# Altium PCB zs-pentagon-dip.PcbDoc
Units mm, origin at the board's own origin, x right, y up, seen from the top; angles counter-clockwise.
Board outline 210 x 160 mm, 2 copper layers (Top Layer, Bottom Layer); 130 components, 242 nets, 1119 pads, 0 vias.
Unrouted connection lines stored in the file: 807.
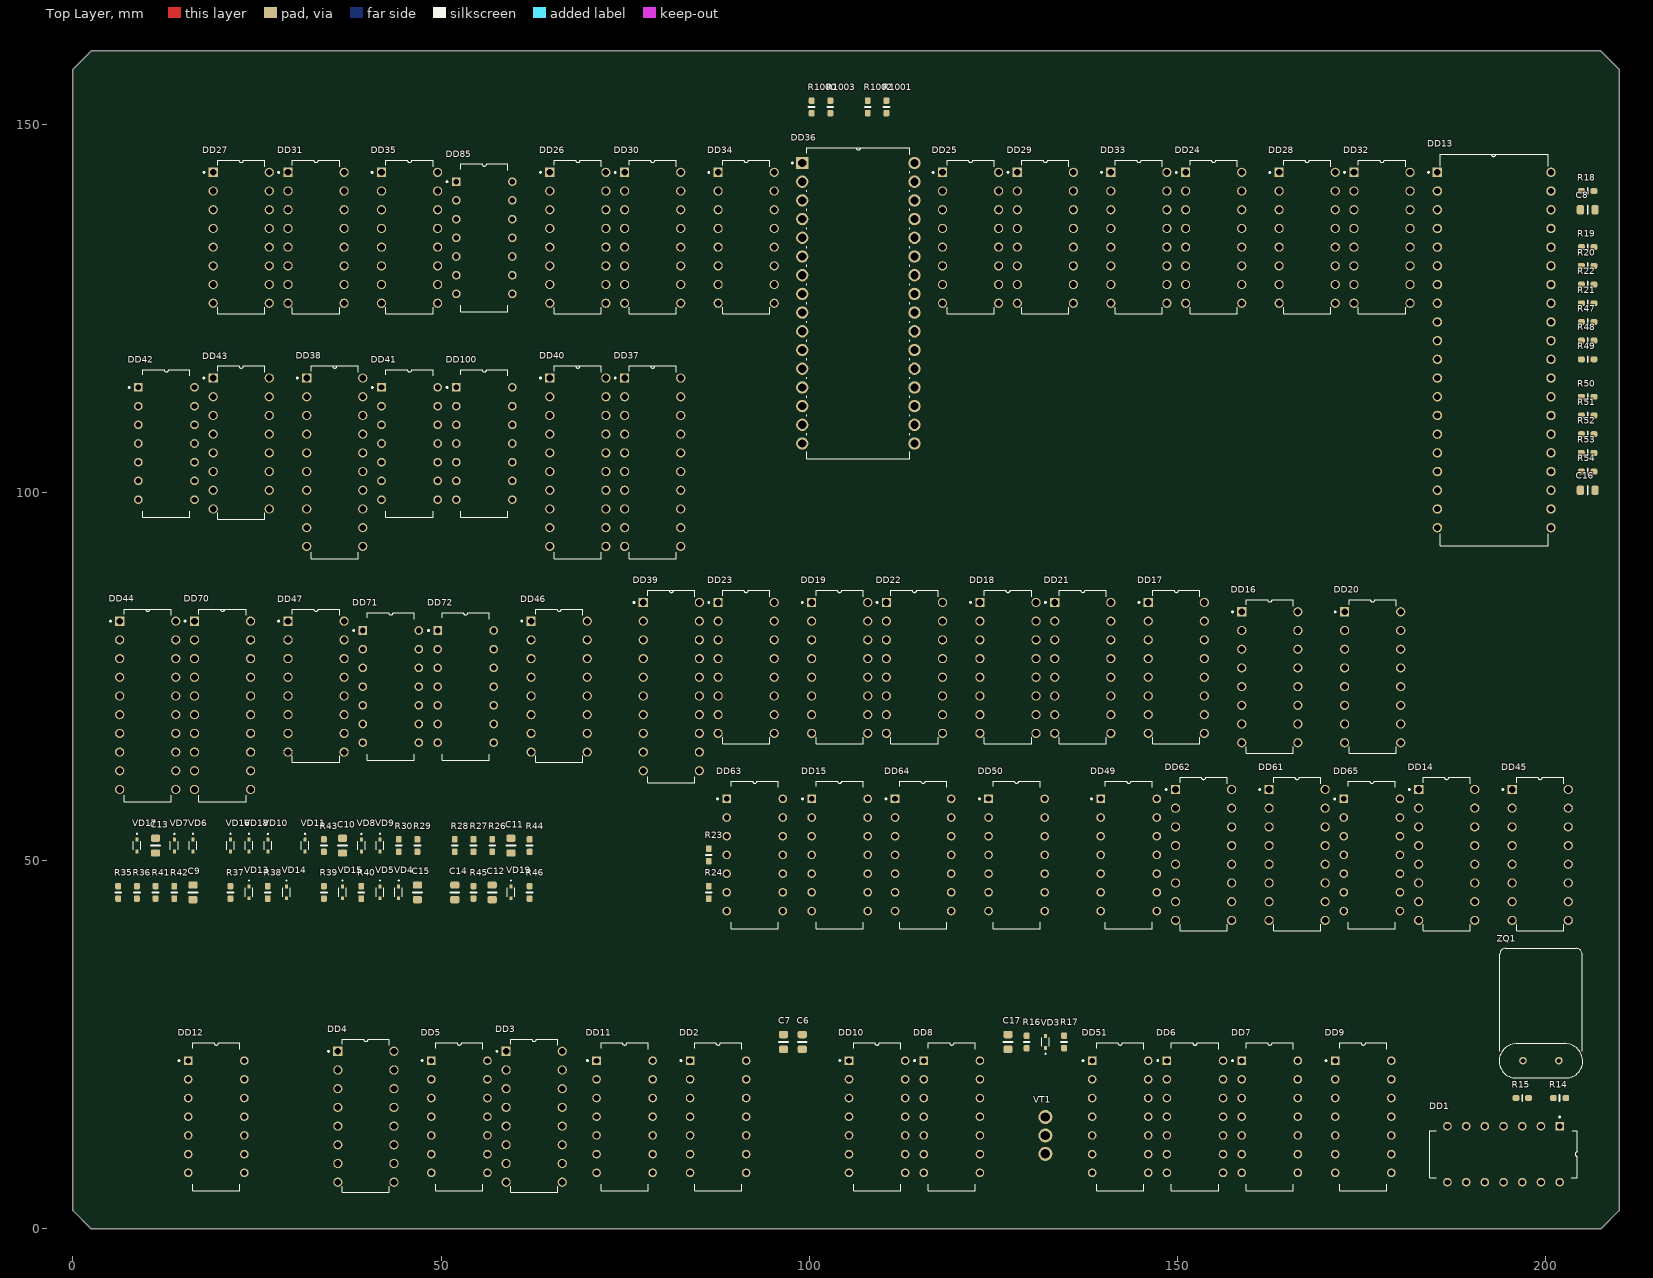
[diagram p0: Top Layer view]
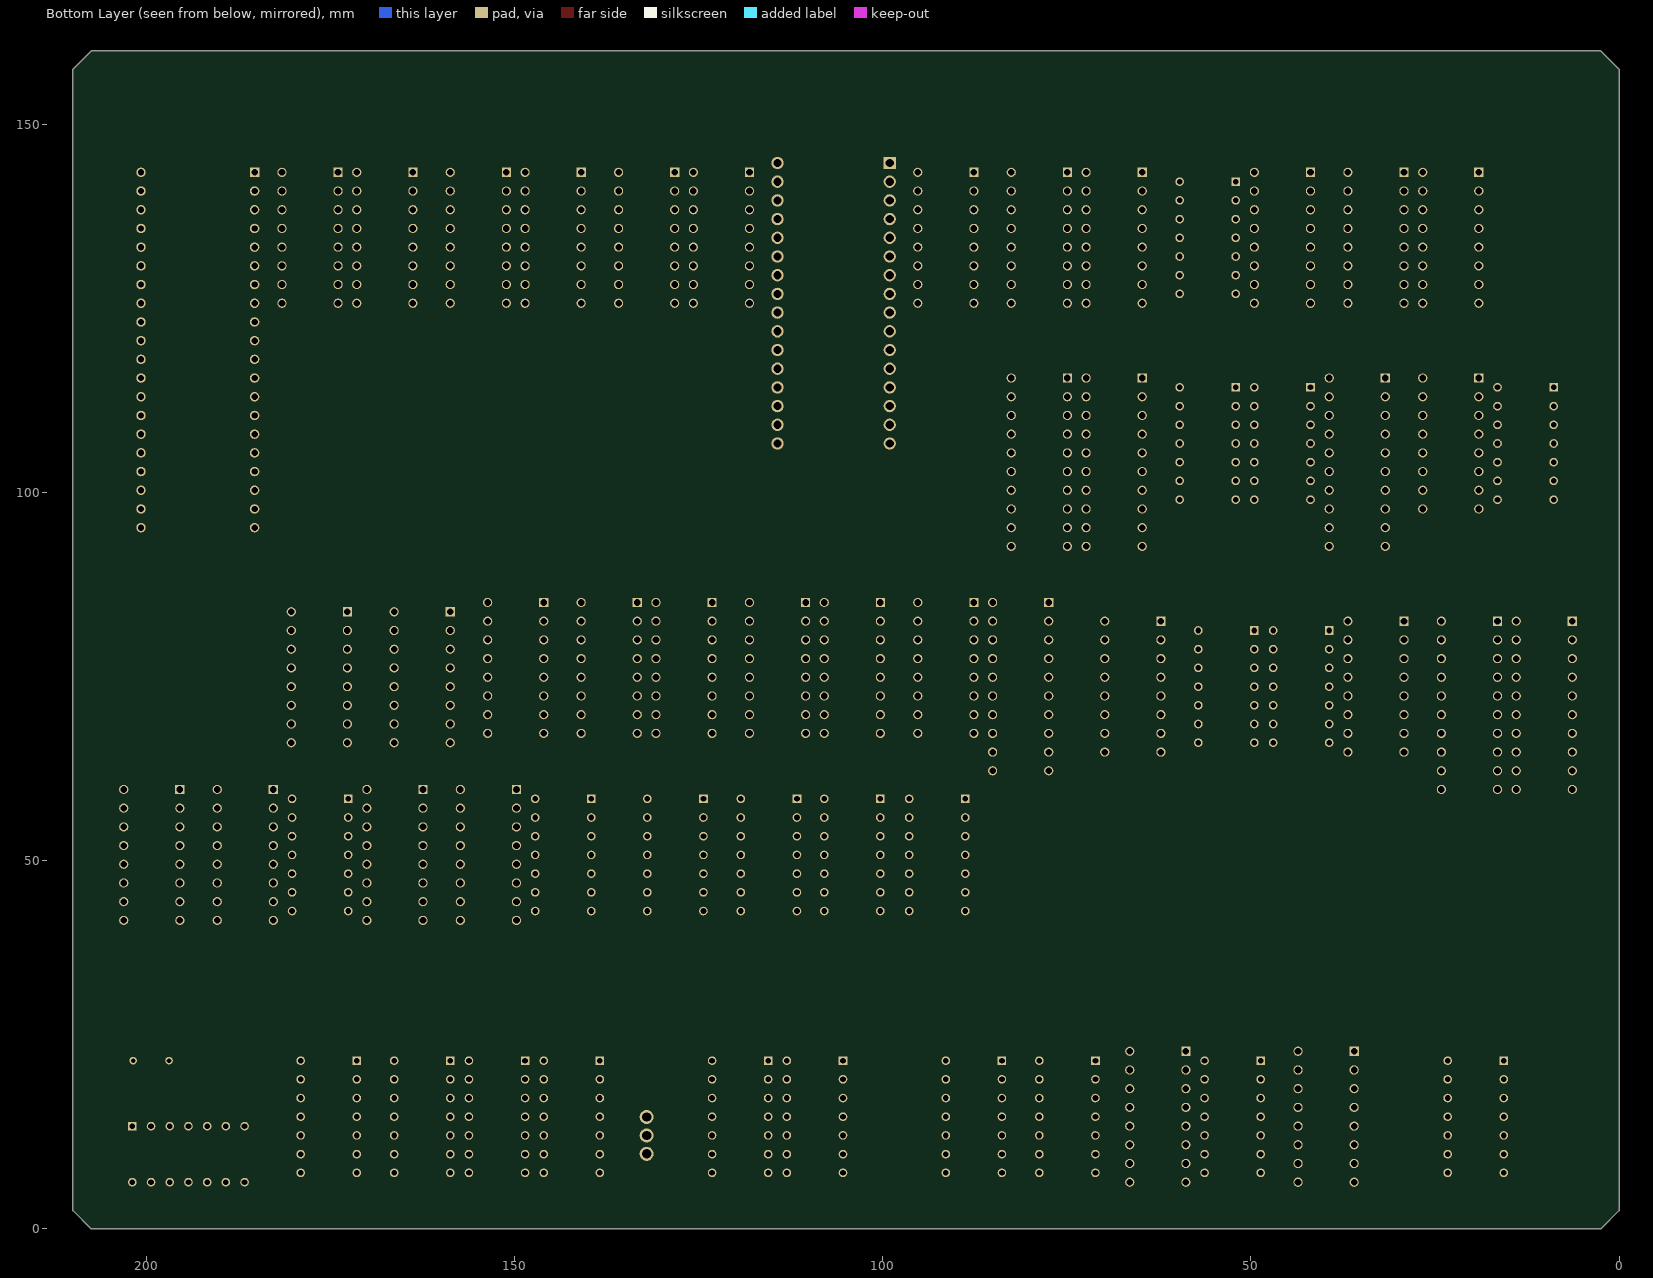
[diagram p1: Bottom Layer view, seen from below]

## Layer stack, top to bottom
Top Solder: solder mask 0.0102, Solder Resist, Dk 3.5
Top Layer: signal copper 0.0356
Dielectric 1: dielectric 0.32, FR-4, Dk 4.8
Bottom Layer: signal copper 0.0356
Bottom Solder: solder mask 0.0102, Solder Resist, Dk 3.5

## Board outline
2.5,0 0,2.5 0,157.5 2.5,160 207.5,160 210,157.5 210,2.5 207.5,0

## Design rules (kind name [scope] priority, off if disabled: settings)
Clearance [All] p1: gap=0.254 ignorepadtopadclearanceinfootprint=FALSE except(0: Arc-Hole Track-Hole SMDPad-Hole THPad-Hole Via-Hole Fill-Hole Poly-Hole Region-Hole Text-Hole)
PolygonConnect [All] p1: connectstyle=Relief reliefconductorwidth=0.254 reliefentries=4 polygonreliefangle="90 Angle" airgapwidth=0.254
RoutingVias [All] p1: holewidth=0.711 width=1.27 viastyle="Through Hole" minholewidth=0.711 minwidth=1.27 maxholewidth=0.711 maxwidth=1.27
SolderMaskExpansion [All] p1: expansion=0.102
Width [All] p1: maxlimit=0.254 minlimit=0.254 preferedwidth=0.254
30 further rules are at their usual default settings.

## Classes and differential pairs
component class zs-pentagon-dip_3: C9 C10 C11 C12 C13 C14 C15 DD10 DD37 DD38 DD40 DD41 DD42 DD43 DD44 DD46 DD47 DD49 DD70 DD71 DD72 DD100 R26 R27 R28 R29 R30 R35 R36 R37 R38 R39 R40 R41 R42 R43 R44 R45 R46 VD4 VD5 VD6 VD7 VD8 VD9 VD10 VD11 VD13 VD14 VD15 VD16 VD17 VD18 VD19
component class zs-pentagon-dip_2: C8 C16 DD13 DD16 DD17 DD18 DD19 DD20 DD21 DD22 DD23 DD24 DD25 DD26 DD27 DD28 DD29 DD30 DD31 DD32 DD33 DD34 DD35 DD36 DD39 DD85 R18 R19 R20 R21 R22 R47 R48 R49 R50 R51 R52 R53 R54 R1000 R1001 R1002 R1003
component class zs-pentagon-dip_1: C6 C7 C17 DD1 DD2 DD3 DD4 DD5 DD6 DD7 DD8 DD9 DD11 DD12 DD14 DD15 DD45 DD50 DD51 DD61 DD62 DD63 DD64 DD65 R14 R15 R16 R17 R23 R24 VD3 VT1 ZQ1

## Components (designator, comment, footprint, x,y, rotation, side; value= is the part's Value field where it differs from the comment)
C6 "0.022 мкФ" C0805 99.06,25.4 r90 top
C7 "510 пФ" C0805 96.52,25.4 r90 top
C8 "10 мкФ" C0805 205.74,138.43 r180 top
C9 "0.47 мкФ" C0805 16.307,45.72 r270 top
C10 "0.22 мкФ" C0805 36.627,52.07 r270 top
C11 "0.1 мкФ" C0805 59.487,52.07 r270 top
C12 "1 мкФ" C0805 56.947,45.72 r270 top
C13 "10 мкФ" C0805 11.227,52.07 r270 top
C14 "1 мкФ" C0805 51.867,45.72 r270 top
C15 "1 мкФ" C0805 46.787,45.72 r270 top
C16 "51 пФ" C0805 205.74,100.33 r180 top
C17 "1200 пФ" C0805 127,25.4 r90 top
DD1 "КР1533ЛН1" DIP14 194.31,10.16 r270 top
DD2 "КР1533ИЕ5" DIP14 87.63,15.24 r0 top
DD3 "КР1533ИЕ7" DIP16 62.65,15.24 r0 top
DD4 "КР1533ИЕ7" DIP16 39.79,15.24 r0 top
DD5 "КР1533ЛИ3" DIP14 52.49,15.24 r0 top
DD6 "КР1533ЛП5" DIP14 152.4,15.24 r0 top
DD7 "КР1533ЛA3" DIP14 162.56,15.24 r0 top
DD8 "КР1533ЛЕ1" DIP14 119.38,15.24 r0 top
DD9 "КР1533ЛИ1" DIP14 175.26,15.24 r0 top
DD10 "КР1533ТМ2" DIP14 109.22,15.24 r0 top
DD11 "КР1533ИЕ5" DIP14 74.93,15.24 r0 top
DD12 "КР1533ИЕ5" DIP14 19.47,15.24 r0 top
DD13 "Z80" DIP1540W47P254L5320H635Q40B 193.04,119.38 r0 top
DD14 "КР1533КП11А" DIP16 186.59,50.8 r0 top
DD15 "КР1533ТМ2" DIP14 104.14,50.8 r0 top
DD16 "КР1533КП11А" DIP16 162.56,74.93 r0 top
DD17 "КР1533КП11А" DIP16 149.86,76.2 r0 top
DD18 "КР1533КП11А" DIP16 127,76.2 r0 top
DD19 "КР1533КП11А" DIP16 104.14,76.2 r0 top
DD20 "КР565РУ7Г" DIP16 176.53,74.93 r0 top
DD21 "КР565РУ7Г" DIP16 137.16,76.2 r0 top
DD22 "КР565РУ7Г" DIP16 114.3,76.2 r0 top
DD23 "КР565РУ7Г" DIP16 91.44,76.2 r0 top
DD24 "КР565РУ7Г" DIP16 154.94,134.62 r0 top
DD25 "КР565РУ7Г" DIP16 121.92,134.62 r0 top
DD26 "КР565РУ7Г" DIP16 68.58,134.62 r0 top
DD27 "КР565РУ7Г" DIP16 22.86,134.62 r0 top
DD28 "КР565РУ7Г" DIP16 167.64,134.62 r0 top
DD29 "КР565РУ7Г" DIP16 132.08,134.62 r0 top
DD30 "КР565РУ7Г" DIP16 78.74,134.62 r0 top
DD31 "КР565РУ7Г" DIP16 33.02,134.62 r0 top
DD32 "КР565РУ7Г" DIP16 177.8,134.62 r0 top
DD33 "КР565РУ7Г" DIP16 144.78,134.62 r0 top
DD34 "КР565РУ7Г" DIP16 91.44,134.62 r0 top
DD35 "КР565РУ7Г" DIP16 45.72,134.62 r0 top
DD36 "AM29F040B" DIP254P1524X482-32 114.3,106.68 r0 top
DD37 "КР1533ИР23" DIP20 78.74,104.14 r0 top
DD38 "КР1533ИР23" DIP20 35.56,104.14 r0 top
DD39 "КР1533ИР23" DIP20 81.28,73.66 r0 top
DD40 "КР1533ИР23" DIP20 68.58,104.14 r0 top
DD41 "К555ИР16" DIP14 45.72,106.68 r0 top
DD42 "К555ИР16" DIP14 12.7,106.68 r0 top
DD43 "КР1533ТМ8" DIP16 22.86,106.68 r0 top
DD44 "КР1533АП5" DIP20 10.16,71.12 r0 top
DD45 "КР1533ТМ8" DIP16 199.29,50.8 r0 top
DD46 "КР1533КП2" DIP16 66.04,73.66 r0 top
DD47 "КР1533КП2" DIP16 33.02,73.66 r0 top
DD49 "КР1533ЛA3" DIP14 143.41,50.8 r0 top
DD50 "КР1533ЛЕ1" DIP14 128.17,50.8 r0 top
DD51 "КР1533ЛН1" DIP14 142.24,15.24 r0 top
DD61 "КР1533КП11А" DIP16 166.27,50.8 r0 top
DD62 "КР1533ТМ9" DIP16 153.57,50.8 r0 top
DD63 "КР1533ЛA3" DIP14 92.61,50.8 r0 top
DD64 "КР1533ЛЕ1" DIP14 115.47,50.8 r0 top
DD65 "КР1533ЛЛ1" DIP14 176.43,50.8 r0 top
DD70 "КР1533АП5" DIP20 20.32,71.12 r0 top
DD71 "КР1533ЛП5" DIP14 43.18,73.66 r0 top
DD72 "К155ЛA12" DIP14 53.34,73.66 r0 top
DD85 "КР1533ЛЛ1" DIP14 55.88,134.62 r0 top
DD100 "К561ЛН2" DIP14 55.88,106.68 r0 top
R14 "510 Ом" R0603 201.93,17.78 r180 top
R15 "510 Ом" R0603 196.85,17.78 r180 top
R16 "160 Ом" R0603 129.54,25.4 r90 top
R17 "1 кОм" R0603 134.62,25.4 r270 top
R18 "10 кОм" R0603 205.74,140.97 r180 top
R19 "10 кОм" R0603 205.74,133.35 r180 top
R20 "10 кОм" R0603 205.74,130.81 r180 top
R21 "750 Ом" R0603 205.74,125.73 r180 top
R22 "10 кОм" R0603 205.74,128.27 r180 top
R23 "470 Ом" R0603 86.36,50.8 r90 top
R24 "470 Ом" R0603 86.36,45.72 r90 top
R26 "10 кОм" R0603 56.947,52.07 r270 top
R27 "10 кОм" R0603 54.407,52.07 r270 top
R28 "10 кОм" R0603 51.867,52.07 r270 top
R29 "10 кОм" R0603 46.787,52.07 r270 top
R30 "10 кОм" R0603 44.247,52.07 r270 top
R35 "68 Ом" R0603 6.147,45.72 r270 top
R36 "68 Ом" R0603 8.687,45.72 r270 top
R37 "68 Ом" R0603 21.387,45.72 r270 top
R38 "68 Ом" R0603 26.467,45.72 r270 top
R39 "68 Ом" R0603 34.087,45.72 r270 top
R40 "68 Ом" R0603 39.167,45.72 r270 top
R41 "1 МОм" R0603 11.227,45.72 r270 top
R42 "1 МОм" R0603 13.767,45.72 r270 top
R43 "10 кОм" R0603 34.087,52.07 r270 top
R44 "430 Ом" R0603 62.027,52.07 r270 top
R45 "620 Ом" R0603 54.407,45.72 r270 top
R46 "100 кОм" R0603 62.027,45.72 r270 top
R47 "10 кОм" R0603 205.74,123.19 r180 top
R48 "10 кОм" R0603 205.74,120.65 r180 top
R49 "10 кОм" R0603 205.74,118.11 r180 top
R50 "10 кОм" R0603 205.74,113.03 r180 top
R51 "10 кОм" R0603 205.74,110.49 r180 top
R52 "10 кОм" R0603 205.74,107.95 r180 top
R53 "10 кОм" R0603 205.74,105.41 r180 top
R54 "10 кОм" R0603 205.74,102.87 r180 top
R1000 "0 Ом" R0603 100.33,152.4 r90 top
R1001 "0 Ом" R0603 110.49,152.4 r90 top
R1002 "0 Ом" R0603 107.95,152.4 r90 top
R1003 "0 Ом" R0603 102.87,152.4 r90 top
VD3 "1N4148W" SODFL1608X70N 132.08,25.4 r90 top
VD4 "1N4148W" SODFL1608X70N 44.247,45.72 r270 top
VD5 "1N4148W" SODFL1608X70N 41.707,45.72 r270 top
VD6 "1N4148W" SODFL1608X70N 16.307,52.07 r270 top
VD7 "1N4148W" SODFL1608X70N 13.767,52.07 r270 top
VD8 "1N4148W" SODFL1608X70N 39.167,52.07 r270 top
VD9 "1N4148W" SODFL1608X70N 41.707,52.07 r270 top
VD10 "1N4148W" SODFL1608X70N 26.467,52.07 r270 top
VD11 "1N4148W" SODFL1608X70N 31.547,52.07 r270 top
VD13 "1N4148W" SODFL1608X70N 23.927,45.72 r270 top
VD14 "1N4148W" SODFL1608X70N 29.007,45.72 r270 top
VD15 "1N4148W" SODFL1608X70N 36.627,45.72 r270 top
VD16 "1N4148W" SODFL1608X70N 21.387,52.07 r270 top
VD17 "1N4148W" SODFL1608X70N 8.687,52.07 r270 top
VD18 "1N4148W" SODFL1608X70N 23.927,52.07 r270 top
VD19 "1N4148W" SODFL1608X70N 59.487,45.72 r270 top
VT1 "КТ315Б" KT-13 132.08,12.7 r90 top
ZQ1 "14 MHz" XTAL_HC-49U 199.39,22.86 r0 top

## Footprints (in the part's own frame and the unit in brackets; to place one, negate y for a bottom-side part, rotate by r counter-clockwise, add the part's x,y. Pads: shape width x height; smd on the part's side, far side on the other; paste and mask are expansions set on the pad)
C0805 [mm] "Chip_Capasitor_0805"
  rrect50% 1x1.25 smd mask+0.102: 1(-1,0) 2(1,0)
  silkscreen extent 0,-0.6 0,0.6, body extent -1,-0.64 1,0.65, height 1.35
DIP14 [mm]
  rect 1.17x1.17 hole 0.77: 1(-3.81,7.62)
  round 1.17 hole 0.77: 2(-3.81,5.08) 3(-3.81,2.54) 4(-3.81,0) 5(-3.81,-2.54) 6(-3.81,-5.08) 7(-3.81,-7.62) 8(3.81,-7.62) 9(3.81,-5.08) 10(3.81,-2.54) 11(3.81,0) 12(3.81,2.54) 13(3.81,5.08) 14(3.81,7.62)
  silkscreen extent -5.15,-10.03 3.2,10.03, body extent -3.96,-9.65 3.96,9.65, height 5.59
DIP16 [mm]
  rect 1.25x1.25 / inner round 1.25 / far side rect 1.25x1.25 hole 0.9: 1(-3.81,8.89)
  round 1.25 hole 0.9: 2(-3.81,6.35) 3(-3.81,3.81) 4(-3.81,1.27) 5(-3.81,-1.27) 6(-3.81,-3.81) 7(-3.81,-6.35) 8(-3.81,-8.89) 9(3.81,-8.89) 10(3.81,-6.35) 11(3.81,-3.81) 12(3.81,-1.27) 13(3.81,1.27) 14(3.81,3.81) 15(3.81,6.35) 16(3.81,8.89)
  silkscreen extent -5.18,-10.29 3.2,10.54, body extent -4.62,-10 4.62,10, height 5.1
DIP20 [mm]
  rect 1.25x1.25 / inner round 1.25 / far side rect 1.25x1.25 hole 0.9: 1(-3.81,11.43)
  round 1.25 hole 0.9: 2(-3.81,8.89) 3(-3.81,6.35) 4(-3.81,3.81) 5(-3.81,1.27) 6(-3.81,-1.27) 7(-3.81,-3.81) 8(-3.81,-6.35) 9(-3.81,-8.89) 10(-3.81,-11.43) 11(3.81,-11.43) 12(3.81,-8.89) 13(3.81,-6.35) 14(3.81,-3.81) 15(3.81,-1.27) 16(3.81,1.27) 17(3.81,3.81) 18(3.81,6.35) 19(3.81,8.89) 20(3.81,11.43)
  silkscreen extent -5.18,-13.08 3.2,13.08, body extent -3.94,-12.7 3.94,12.7, height 5.08
DIP254P1524X482-32 [mil]
  rect 66x66 hole 44: 1(-600,1500)
  round 66 hole 44: 2(-600,1400) 3(-600,1300) 4(-600,1200) 5(-600,1100) 6(-600,1000) 7(-600,900) 8(-600,800) 9(-600,700) 10(-600,600) 11(-600,500) 12(-600,400) 13(-600,300) 14(-600,200) 15(-600,100) 16(-600,0) 17(0,0) 18(0,100) 19(0,200) 20(0,300) 21(0,400) 22(0,500) 23(0,600) 24(0,700) 25(0,800) 26(0,900) 27(0,1000) 28(0,1100) 29(0,1200) 30(0,1300) 31(0,1400) 32(0,1500)
  silkscreen extent -657,-82 -25,1582, body extent -645,-49 49,1549, height 377
DIP1540W47P254L5320H635Q40B [mm]
  rect 1.28x1.28 hole 0.85: 1(-7.718,24.13)
  round 1.28 hole 0.85: 2(-7.718,21.59) 3(-7.718,19.05) 4(-7.718,16.51) 5(-7.718,13.97) 6(-7.718,11.43) 7(-7.718,8.89) 8(-7.718,6.35) 9(-7.718,3.81) 10(-7.718,1.27) 11(-7.718,-1.27) 12(-7.718,-3.81) 13(-7.718,-6.35) 14(-7.718,-8.89) 15(-7.718,-11.43) 16(-7.718,-13.97) 17(-7.718,-16.51) 18(-7.718,-19.05) 19(-7.718,-21.59) 20(-7.718,-24.13) 21(7.718,-24.13) 22(7.718,-21.59) 23(7.718,-19.05) 24(7.718,-16.51) 25(7.718,-13.97) 26(7.718,-11.43) 27(7.718,-8.89) 28(7.718,-6.35) 29(7.718,-3.81) 30(7.718,-1.27) 31(7.718,1.27) 32(7.718,3.81) 33(7.718,6.35) 34(7.718,8.89) 35(7.718,11.43) 36(7.718,13.97) 37(7.718,16.51) 38(7.718,19.05) 39(7.718,21.59) 40(7.718,24.13)
  silkscreen extent -9.02,-26.6 7.35,26.6, body extent -8.85,-26.2 8.85,26.2, height 9.06
KT-13 [mm]
  round 1.905 hole 1.27: 1(-2.5,0) 2(0,0) 3(2.5,0)
  body extent -3.6,-1.35 3.6,1.65, height 5.72
R0603 [mm] "Chip_Resistor_0603"
  rrect50% 0.9x0.8 smd mask+0.1: 1(-0.85,0) 2(0.85,0)
  silkscreen extent 0,-0.4 0,0.4, body extent -0.8,-0.4 0.8,0.4, height 0.45
SODFL1608X70N [mm]
  rrect10% 0.53x0.4 smd: A(0.8,0) C(-0.8,0)
  silkscreen extent -1.65,-0.52 0.6,0.52, body extent -0.8,-0.4 0.8,0.4, height 0.7
XTAL_HC-49U [mm]
  round 1.03 hole 0.63: 1(-2.44,0) 2(2.44,0)
  silkscreen extent -5.68,-2.33 5.68,15.24, body extent -5.51,-2.5 5.84,2.5, height 14.22

## Part data
C6 C7 C8 C9 C10 C11 C12 C13 C14 C15 C16 C17: library part CapCer
R14 R15 R16 R17 R18 R19 R20 R21 R22 R23 R24 R26 R27 R28 R29 R30 R35 R36 R37 R38 R39 R40 R41 R42 R43 R44 R45 R46 R47 R48 R49 R50 R51 R52 R53 R54 R1000 R1001 R1002 R1003: library part Res
VT1: "NPN Transistor"
ZQ1: library part HC-49U_14M

## Nets (pads, with @x,y where several pads share a name; then routed paths per layer and width w, separated by ;. In a path a pad name is that pad's centre, name@x,y a point inside that pad or via, vN(x,y) a via of type N, cw(c..) or ccw(c..) an arc to the next point about the centre after c; other vN are vias at no path point)
A0: DD13.30 DD18.3 DD36.12 DD50.8
A1: DD13.31 DD18.6 DD36.11 DD64.5
A2: DD13.32 DD18.10 DD36.10
A3: DD13.33 DD18.13 DD36.9
A4: DD13.34 DD19.3 DD36.8
A5: DD13.35 DD19.6 DD36.7
A6: DD13.36 DD19.10 DD36.6
A7: DD13.37 DD18.2 DD36.5
A8: DD13.38 DD18.5 DD36.27 DD70.2
A9: DD13.39 DD18.11 DD36.26 DD70.4
A10: DD13.40 DD18.14 DD36.23 DD70.6
A11: DD13.1 DD19.2 DD36.25 DD70.8
A12: DD13.2 DD19.5 DD36.4 DD70.11
A13: DD13.3 DD19.11 DD36.28 DD70.13
A14: DD13.4 DD36.29 DD50.2 DD61.3 DD61.10 DD63.4 DD70.15
A15: DD13.5 DD36.3 DD50.3 DD61.6 DD63.5 DD64.6 DD70.17
B1: DD3.6 DD10.11 DD16.3
B2: DD3.7 DD16.6
B3: DD1.5 DD4.3 DD16.10
B4: DD4.2 DD8.8 DD16.13
B5: DD4.6 DD9.12 DD17.3
B6: DD2.12 DD11.14 DD14.3
B7: DD11.1 DD11.12 DD14.6
B8: DD11.9 DD14.10
B9: DD11.8 DD17.6
B10: DD5.9 DD11.11 DD12.14 DD17.10
B11: DD5.10 DD12.1 DD12.12 DD16.2
B12: DD9.9 DD12.2 DD12.9 DD14.2 DD14.13
B13: DD8.3 DD9.10 DD12.8 DD14.5
B14: DD14.4 DD16.5
B15: DD14.7 DD16.11
B16: DD14.9 DD16.14
B17: DD14.12 DD17.2
B18: DD17.5 DD51.8
BL: C17.2 DD46.1 DD46.15 DD47.1 DD47.15 R16.2 VT1.1
BLUE: R35.1 R40.1
BUSRQ/: DD13.25 R19.2
C1: DD2.9
C2: DD5.6
C3: DD1.12 DD40.11
C5: DD10.8
C6: DD8.13 DD9.5
C7: DD6.3
C8: C7.1 DD13.16 DD51.10
C13: DD85.2 R23.1
C16: DD20.3 DD21.3 DD22.3 DD23.3 DD24.3 DD25.3 DD26.3 DD27.3 DD28.3 DD29.3 DD30.3 DD31.3 DD32.3 DD33.3 DD34.3 DD35.3 DD51.4
C17: DD7.6 DD37.11
C18: DD7.3 DD38.11
C19: DD39.1 DD49.6
C20: DD39.11 DD49.11 DD50.6
C25: DD1.8 DD5.3 DD13.6 DD45.4 R21.2
C29: DD6.4 DD7.4 DD8.2 DD15.9
C30: DD7.1 DD14.1 DD15.8
C31: DD1.2 DD1.3 DD45.9 R14.2 R15.1
C33: DD19.14 DD61.4
C34: DD19.13 DD61.7
C35: DD17.13 DD62.10
C36: DD62.12
C37: DD20.15 DD21.15 DD22.15 DD23.15 DD24.15 DD25.15 DD26.15 DD27.15 DD63.11
C38: DD28.15 DD29.15 DD30.15 DD31.15 DD32.15 DD33.15 DD34.15 DD35.15 DD63.3
C39: C8.2 DD13.26 DD62.1 R18.2
CAS: DD45.7 DD63.2 DD63.13
CAS/: DD15.3 DD15.11 DD45.6
CPU: DD15.5 DD16.15 DD17.15 DD49.12
D0: DD13.14 DD20.2 DD28.2 DD36.13 DD39.2 DD43.4 DD44.3 DD62.3 R47.2
D1: DD13.15 DD21.2 DD29.2 DD36.14 DD39.5 DD43.5 DD44.5 DD62.4 R48.2
D2: DD13.12 DD22.2 DD30.2 DD36.15 DD39.6 DD43.12 DD44.7 DD62.6 R49.2
D3: DD13.8 DD23.2 DD31.2 DD36.17 DD39.9 DD43.13 DD44.9 DD62.11 R50.2
D4: DD13.7 DD24.2 DD32.2 DD36.18 DD39.12 DD44.12 DD62.13 R51.2
D5: DD13.9 DD25.2 DD33.2 DD36.19 DD39.15 DD44.14 DD62.14 R52.2
D6: DD13.10 DD26.2 DD34.2 DD36.20 DD39.16 DD44.16 R53.2
D7: DD13.13 DD27.2 DD35.2 DD36.21 DD39.19 DD44.18 R54.2
DIS: DD5.13 DD6.5 DD9.1 DD15.6 DD18.15 DD19.15 DD65.13
GND: C7.2 C8.1 C11.2 C16.1 C17.1 DD1.7 DD2.2 DD2.3 DD2.10 DD3.8 DD3.14 DD4.1 DD4.8 DD4.9 DD4.10 DD4.14 DD5.7 DD6.7 DD7.7 DD8.7 DD9.7 DD10.7 DD11.2 DD11.3 DD11.10 DD12.10 DD13.29 DD14.8 DD14.11 DD14.15 DD15.7 DD16.8 DD17.8 DD17.14 DD18.8 DD19.8 DD20.16 DD21.16 DD22.16 DD23.16 DD24.16 DD25.16 DD26.16 DD27.16 DD28.16 DD29.16 DD30.16 DD31.16 DD32.16 DD33.16 DD34.16 DD35.16 DD36.16 DD36.22 DD37.1 DD37.10 DD38.1 DD38.10 DD39.10 DD40.1 DD40.10 DD41.1 DD41.7 DD42.7 DD43.8 DD44.10 DD45.8 DD46.8 DD47.8 DD49.7 DD50.7 DD51.7 DD61.8 DD61.15 DD62.8 DD63.7 DD64.7 DD65.7 DD70.1 DD70.10 DD70.19 DD71.7 DD72.7 DD85.7 DD100.7 R16.1 R17.1 VD3.A VD18.C VD19.A
IORQ/: DD13.20 DD50.9 DD64.8
K9: DD43.2 DD46.3 DD46.4
K10: DD43.7 DD46.12 DD46.13
K11: DD43.10 DD47.3 DD47.4
KA0: VD4.A
KA1: VD5.A
KA2: VD6.A
KA3: VD7.A
KA4: VD8.A
KA5: VD9.A
KA6: VD10.A
KA7: VD11.A
KD0: DD44.17 R26.1
KD1: DD44.15 R27.1
KD2: DD44.13 R28.1
KD3: DD44.11 R29.1
KD4: DD44.8 R30.1
M1/: DD13.27
MREQ/: DD13.19 DD50.12 DD85.1
NetC6_1: C6.1 DD51.11 R17.2 VD3.C
NetC6_2: C6.2 DD5.8 DD6.2 DD6.10
NetC9_1: C9.1 DD7.13 DD100.8
NetC9_2: C9.2 R41.1
NetC10_1: C10.1 DD43.15
NetC10_2: C10.2 C11.1 R43.2
NetC12_2: C12.2 C13.2 R45.2
NetC13_1: C13.1 VD18.A VD19.C
NetC14_1: C14.1 DD100.2 VD16.C VD17.A
NetC14_2: C14.2 DD100.3 R46.2
NetC15_1: C15.1 DD100.4 R46.1
NetC15_2: C15.2 DD100.5
NetDD1_1: DD1.1 R14.1 ZQ1.2
NetDD1_4: DD1.4 DD2.1 R15.2 ZQ1.1
NetDD1_6: DD1.6 DD7.9
NetDD1_9: DD1.9 DD2.8 DD3.5
NetDD1_13: DD1.13 DD3.2 DD5.5
NetDD2_14: DD2.14 DD6.1 DD7.8
NetDD3_3: DD3.3 DD5.4
NetDD3_12: DD3.12 DD4.5
NetDD4_7: DD4.7 DD8.9 DD9.4
NetDD4_11: DD4.11 DD4.12
NetDD5_1: DD5.1 DD49.4 DD49.9 DD50.13
NetDD5_11: DD5.11 DD8.11 DD9.8
NetDD5_12: DD5.12 DD15.2
NetDD6_6: DD6.6 DD15.12
NetDD6_8: DD6.8 VT1.3
NetDD6_9: DD6.9 DD9.11
NetDD6_11: DD6.11 DD46.14 DD47.14
NetDD6_12: DD6.12 DD42.10
NetDD6_13: DD6.13 DD7.11
NetDD7_2: DD7.2 DD7.5 DD9.3
NetDD7_10: DD7.10 DD8.10 DD9.13
NetDD7_12: DD7.12 DD40.19
NetDD8_1: DD8.1 DD51.9
NetDD8_4: DD8.4 DD10.3 DD43.9
NetDD8_5: DD8.5 DD51.12
NetDD8_12: DD8.12 DD12.3 DD12.11
NetDD9_6: DD9.6 DD10.12
NetDD10_5: DD10.5 R44.2
NetDD36_24: DD36.24 DD85.3
NetDD37_2: DD37.2 DD40.3
NetDD37_5: DD37.5 DD40.4
NetDD37_6: DD37.6 DD40.7
NetDD37_9: DD37.9 DD40.8
NetDD37_12: DD37.12 DD40.13
NetDD37_15: DD37.15 DD40.14
NetDD37_16: DD37.16 DD40.17
NetDD37_19: DD37.19 DD40.18
NetDD38_2: DD38.2 DD41.2
NetDD38_5: DD38.5 DD41.3
NetDD38_6: DD38.6 DD41.4
NetDD38_9: DD38.9 DD41.5
NetDD38_12: DD38.12 DD42.2
NetDD38_15: DD38.15 DD42.3
NetDD38_16: DD38.16 DD42.4
NetDD38_19: DD38.19 DD42.5
NetDD40_2: DD40.2 DD46.6
NetDD40_5: DD40.5 DD46.10
NetDD40_6: DD40.6 DD47.6
NetDD40_9: DD40.9 DD46.5
NetDD40_12: DD40.12 DD46.11
NetDD40_15: DD40.15 DD47.5
NetDD40_16: DD40.16 DD47.10 DD47.11
NetDD41_6: DD41.6 DD42.6
NetDD41_9: DD41.9 DD42.9
NetDD41_10: DD41.10 DD42.1
NetDD44_1: DD44.1 DD44.19 DD49.3
NetDD44_4: DD44.4 DD100.6
NetDD46_2: DD46.2 DD47.2
NetDD46_7: DD46.7 DD71.1
NetDD46_9: DD46.9 DD71.4
NetDD47_7: DD47.7 DD71.9
NetDD47_9: DD47.9 VD13.C VD14.C VD15.C
NetDD49_2: DD49.2 DD50.10 DD51.13
NetDD49_8: DD49.8 DD50.5
NetDD50_1: DD50.1 DD51.1 R24.2
NetDD50_4: DD50.4 DD51.3
NetDD50_11: DD50.11 R24.1
NetDD51_2: DD51.2 R23.2
NetDD61_1: DD61.1 DD63.6
NetDD61_2: DD61.2 DD62.2
NetDD61_5: DD61.5 DD62.5
NetDD61_9: DD61.9 DD65.12
NetDD61_11: DD61.11 DD62.7
NetDD62_9: DD62.9 DD64.13
NetDD62_15: DD62.15 DD64.11
NetDD63_1: DD63.1 DD64.2 DD64.3 DD65.11
NetDD63_8: DD63.8 DD64.12
NetDD63_9: DD63.9 DD64.10
NetDD63_10: DD63.10 DD64.4
NetDD63_12: DD63.12 DD64.1
NetDD70_3: DD70.3 VD11.C
NetDD70_5: DD70.5 VD10.C
NetDD70_7: DD70.7 VD9.C
NetDD70_9: DD70.9 VD8.C
NetDD70_12: DD70.12 VD7.C
NetDD70_14: DD70.14 VD6.C
NetDD70_16: DD70.16 VD5.C
NetDD70_18: DD70.18 VD4.C
NetDD71_3: DD71.3 DD72.1 DD72.2
NetDD71_6: DD71.6 DD72.4 DD72.5
NetDD71_8: DD71.8 DD72.9 DD72.10
NetDD71_11: DD71.11 DD72.12 DD72.13
NetDD72_3: DD72.3 R35.2
NetDD72_6: DD72.6 R36.2
NetDD72_8: DD72.8 R37.2
NetDD100_1: DD100.1 R45.1 VD16.A VD17.C
NetDD100_9: DD100.9 DD100.10 R42.1
NetDD100_11: DD100.11 R41.2 R42.2
NetR36_1: R36.1 R39.1
NetR37_1: R37.1 R38.1
NetR38_2: R38.2 VD13.A
NetR39_2: R39.2 VD14.A
NetR40_2: R40.2 VD15.A
NMI/: DD13.17 R22.2
Q0: DD20.14 DD21.14 DD22.14 DD23.14 DD24.14 DD25.14 DD26.14 DD27.14 DD28.14 DD29.14 DD30.14 DD31.14 DD32.14 DD33.14 DD34.14 DD35.14 DD37.3 DD38.3 DD39.3
Q1: DD37.4 DD38.4 DD39.4
Q2: DD37.7 DD38.7 DD39.7
Q3: DD37.8 DD38.8 DD39.8
Q4: DD37.13 DD38.13 DD39.13
Q5: DD37.14 DD38.14 DD39.14
Q6: DD37.17 DD38.17 DD39.17
Q7: DD37.18 DD38.18 DD39.18
R1: DD16.4 DD17.4 DD18.4 DD20.5 DD21.5 DD22.5 DD23.5 DD24.5 DD25.5 DD26.5 DD27.5 DD28.5 DD29.5 DD30.5 DD31.5 DD32.5 DD33.5 DD34.5 DD35.5
R2: DD16.7 DD17.7 DD18.7 DD20.7 DD21.7 DD22.7 DD23.7 DD24.7 DD25.7 DD26.7 DD27.7 DD28.7 DD29.7 DD30.7 DD31.7 DD32.7 DD33.7 DD34.7 DD35.7
R3: DD16.9 DD17.9 DD18.9 DD20.6 DD21.6 DD22.6 DD23.6 DD24.6 DD25.6 DD26.6 DD27.6 DD28.6 DD29.6 DD30.6 DD31.6 DD32.6 DD33.6 DD34.6 DD35.6
R4: DD16.12 DD17.12 DD18.12 DD20.12 DD21.12 DD22.12 DD23.12 DD24.12 DD25.12 DD26.12 DD27.12 DD28.12 DD29.12 DD30.12 DD31.12 DD32.12 DD33.12 DD34.12 DD35.12
R5: DD19.4 DD20.11 DD21.11 DD22.11 DD23.11 DD24.11 DD25.11 DD26.11 DD27.11 DD28.11 DD29.11 DD30.11 DD31.11 DD32.11 DD33.11 DD34.11 DD35.11
R6: DD19.7 DD20.10 DD21.10 DD22.10 DD23.10 DD24.10 DD25.10 DD26.10 DD27.10 DD28.10 DD29.10 DD30.10 DD31.10 DD32.10 DD33.10 DD34.10 DD35.10
R7: DD19.9 DD20.13 DD21.13 DD22.13 DD23.13 DD24.13 DD25.13 DD26.13 DD27.13 DD28.13 DD29.13 DD30.13 DD31.13 DD32.13 DD33.13 DD34.13 DD35.13
R8: DD19.12 DD20.9 DD21.9 DD22.9 DD23.9 DD24.9 DD25.9 DD26.9 DD27.9 DD28.9 DD29.9 DD30.9 DD31.9 DD32.9 DD33.9 DD34.9 DD35.9
R9: DD20.1 DD21.1 DD22.1 DD23.1 DD24.1 DD25.1 DD26.1 DD27.1 DD28.1 DD29.1 DD30.1 DD31.1 DD32.1 DD33.1 DD34.1 DD35.1 R1000.2
RAS: DD9.2 DD45.2 DD45.5 DD49.13
RAS/: C16.2 DD16.1 DD17.1 DD18.1 DD19.1 DD20.4 DD21.4 DD22.4 DD23.4 DD24.4 DD25.4 DD26.4 DD27.4 DD28.4 DD29.4 DD30.4 DD31.4 DD32.4 DD33.4 DD34.4 DD35.4 DD45.3
RD: DD1.10 DD49.1 DD49.5
RD/: DD1.11 DD13.21 DD49.10
RFS/: DD5.2 DD13.28
ROM16: DD36.2 R1001.2
ROM17: DD36.30 R1002.2
ROM18: DD36.1 R1003.2
SYNC: DD72.11
TAPEIN: C12.1
TAPEOUT: R43.1
VCC: DD1.14 DD2.5 DD3.4 DD3.11 DD3.16 DD4.4 DD4.15 DD4.16 DD5.14 DD6.14 DD7.14 DD8.14 DD9.14 DD10.1 DD10.4 DD10.10 DD10.13 DD10.14 DD11.5 DD12.5 DD13.11 DD14.14 DD14.16 DD15.1 DD15.4 DD15.10 DD15.13 DD15.14 DD16.16 DD17.11 DD17.16 DD18.16 DD19.16 DD20.8 DD21.8 DD22.8 DD23.8 DD24.8 DD25.8 DD26.8 DD27.8 DD28.8 DD29.8 DD30.8 DD31.8 DD32.8 DD33.8 DD34.8 DD35.8 DD36.32 DD37.20 DD38.20 DD39.20 DD40.20 DD41.8 DD41.14 DD42.8 DD42.14 DD43.1 DD43.16 DD44.20 DD45.1 DD45.16 DD46.16 DD47.16 DD49.14 DD50.14 DD51.14 DD61.16 DD62.16 DD63.14 DD64.14 DD65.14 DD70.20 DD71.2 DD71.5 DD71.10 DD71.12 DD71.14 DD72.14 DD85.14 DD100.14 R18.1 R19.1 R20.1 R21.1 R22.1 R26.2 R27.2 R28.2 R29.2 R30.2 R44.1 R47.1 R48.1 R49.1 R50.1 R51.1 R52.1 R53.1 R54.1 R1000.1 R1001.1 R1002.1 R1003.1 VT1.2
WAIT/: DD13.24 R20.2
WR: DD8.6
WR/: DD13.22 DD64.9
С7: DD71.13
pads on no net: DD2.4 DD2.6 DD2.7 DD2.11 DD2.13 DD3.1 DD3.9 DD3.10 DD3.13 DD3.15 DD4.13 DD10.2 DD10.6 DD10.9 DD11.4 DD11.6 DD11.7 DD11.13 DD12.4 DD12.6 DD12.7 DD12.13 DD13.18 DD13.23 DD36.31 DD41.11 DD41.12 DD41.13 DD42.11 DD42.12 DD42.13 DD43.3 DD43.6 DD43.11 DD43.14 DD44.2 DD44.6 DD45.10 DD45.11 DD45.12 DD45.13 DD45.14 DD45.15 DD47.12 DD47.13 DD51.5 DD51.6 DD61.12 DD61.13 DD61.14 DD65.1 DD65.2 DD65.3 DD65.4 DD65.5 DD65.6 DD65.8 DD65.9 DD65.10 DD85.4 DD85.5 DD85.6 DD85.8 DD85.9 DD85.10 DD85.11 DD85.12 DD85.13 DD100.12 DD100.13